# Altium PCB QuadSwitch.PcbDoc
Units mm, origin at the board's own origin, x right, y up, seen from the top; angles counter-clockwise.
Board outline 20.83 x 17.27 mm, 2 copper layers (Top Layer, Bottom Layer); 2 components, 5 nets, 12 pads, 0 vias.
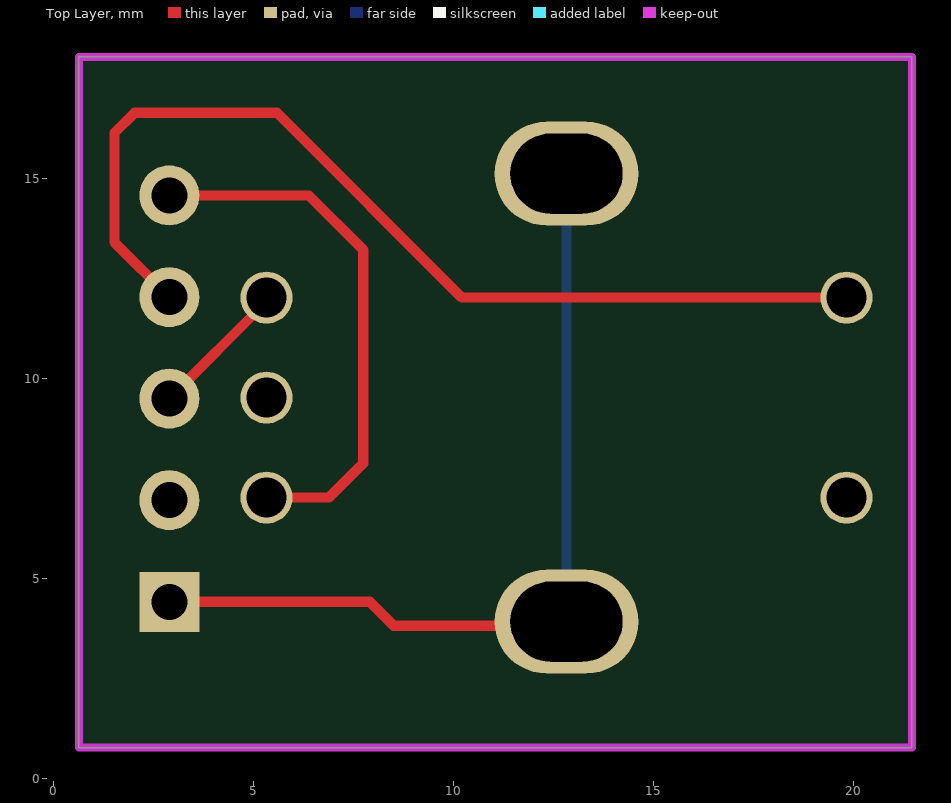
[diagram p0: Top Layer view]
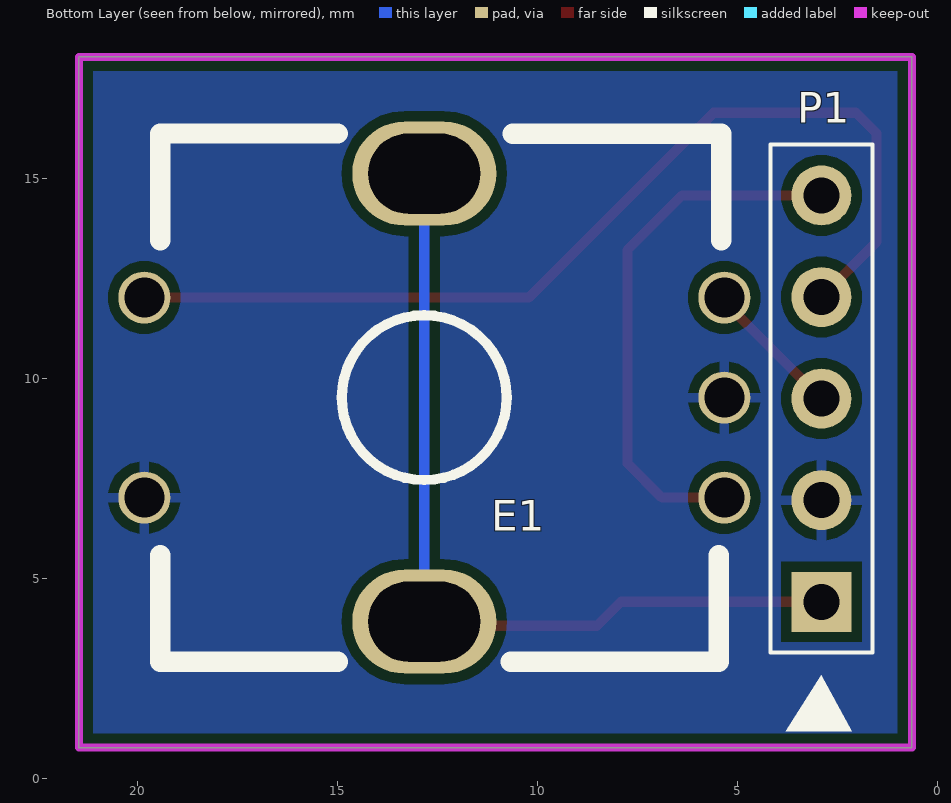
[diagram p1: Bottom Layer view, seen from below]

## Layer stack, top to bottom
Top Solder: solder mask 0.0102, Solder Resist, Dk 3.5
Top Layer: signal copper 0.0356
Dielectric 1: dielectric 0.32, FR-4, Dk 4.8
Bottom Layer: signal copper 0.0356
Bottom Solder: solder mask 0.0102, Solder Resist, Dk 3.5

## Board outline
0.635,0.762 21.463,0.762 21.463,18.034 0.635,18.034

## Design rules (kind name [scope] priority, off if disabled: settings)
Clearance [All] p1: gap=0.254 ignorepadtopadclearanceinfootprint=FALSE except(0: Arc-Hole Track-Hole SMDPad-Hole THPad-Hole Via-Hole Fill-Hole Poly-Hole Region-Hole Text-Hole)
HoleSize [All] p1: absolutevalues=TRUE maxlimit=3 minlimit=0.025 maxpercent=80.000 minpercent=20.000
PolygonConnect [All] p1: connectstyle=Relief reliefconductorwidth=0.254 reliefentries=4 polygonreliefangle="90 Angle" airgapwidth=0.254
RoomDefinition QuadSwitch [InComponentClass('QuadSwitch')] p1: confinementstyle=ConfineIn formatcopy=TRUE lockcomponents=FALSE outline 0,0 22.098,0 22.098,19.05 0,19.05
RoutingVias [All] p1: holewidth=0.711 width=1.27 viastyle="Through Hole" minholewidth=0.711 minwidth=1.27 maxholewidth=0.711 maxwidth=1.27
SolderMaskExpansion [All] p1: expansion=0.102 istentingtop=FALSE
Width [All] p1: maxlimit=0.254 minlimit=0.254 preferedwidth=0.254
29 further rules are at their usual default settings.

## Components (designator, comment, footprint, x,y, rotation, side; value= is the part's Value field where it differs from the comment)
E1 "PEC12R-4217F" "ROTARYENCODER - PEC12R" 12.827,9.513 r90 bottom locked
P1 "Header, 5-Pin" HDR1X5S 2.897,4.409 r90 bottom locked

## Footprints (in the part's own frame and the unit in brackets; to place one, negate y for a bottom-side part, rotate by r counter-clockwise, add the part's x,y. Pads: shape width x height; smd on the part's side, far side on the other; paste and mask are expansions set on the pad)
HDR1X5S [mm] "Header; 5 Position; Straight"
  rect 1.5x1.5 hole 0.9: 1(0,0)
  round 1.5 hole 0.9: 2(2.54,0) 3(5.08,0) 4(7.62,0) 5(10.16,0)
  silkscreen extent -3.24,-1.27 11.43,1.27, body extent -1.27,-1.27 11.43,1.27, height 6
"ROTARYENCODER - PEC12R" [mm] "Bourns Rotary Encoder - PEC12R-4217F (17.5 mm)"
  round 1.3 hole 1: Common(0,-7.5) PhaseA(-2.5,-7.5) PhaseB(2.5,-7.5) SW1(-2.5,7) SW2(2.5,7)
  oval 2.6x3.6 hole 2 slot 2.8 at 90 deg: SHLD1(-5.6,0) SHLD2(5.6,0)
  silkscreen extent -6.6,-7.42 6.6,6.6, body extent -7.5,-7.5 7.5,7.5, height 17.85

## Part data
E1: library part "Rotary Encoder - PEC12R-4217F", "Rotary Encoder Bourns 17.5 mm shaft", Digikey=PEC12R-4220F-N0024-ND
P1: library part "Header 1x5", LatestRevisionDate=17-Jul-2002, LatestRevisionNote="Re-released for DXP Platform.", Publisher="Altium Limited"

## Nets (pads, with @x,y where several pads share a name; then routed paths per layer and width w, separated by ;. In a path a pad name is that pad's centre, name@x,y a point inside that pad or via, vN(x,y) a via of type N, cw(c..) or ccw(c..) an arc to the next point about the centre after c; other vN are vias at no path point)
EARTH: E1.SHLD1 E1.SHLD2 P1.1 | length 22.1
  Top Layer w0.254: P1.1 7.91,4.409 8.509,3.81 12.724,3.81 E1.SHLD1 ; E1.SHLD1@12.656,3.977 E1.SHLD1@12.717,4.032 ; E1.SHLD1 12.827,4.135 12.976,4.272 12.827,4.123 E1.SHLD1
  Bottom Layer w0.254: E1.SHLD1@12.827,4.135 E1.SHLD2
GND: E1.Common E1.SW1 P1.2 | length 0.1
  Bottom Layer w0.254: P1.2 P1.2@2.897,7.083
NetE1_PhaseA: E1.PhaseA P1.5 | length 13.5
  Top Layer w0.254: P1.5 6.386,14.569 7.747,13.208 7.747,7.874 6.886,7.013 E1.PhaseA
NetE1_PhaseB: E1.PhaseB P1.3 | length 3.5
  Top Layer w0.254: P1.3 5.327,11.919 E1.PhaseB
NetE1_SW2: E1.SW2 P1.4 | length 25.1
  Top Layer w0.254: P1.4 1.524,13.402 1.524,16.129 2.032,16.637 5.588,16.637 10.212,12.013 E1.SW2

## Polygon pours and split planes (outlines as drawn)
GND on Bottom Layer "GND_L02_P000" (solid, pour order 0): 0.762,18.034 21.463,18.034 21.463,0.762 0.762,0.762

## Keep-outs
Keep-Out Layer:
  the board outline again, w0.2